# EAGLE board PCEMouse_rev_B (EAGLE 9.6.2)
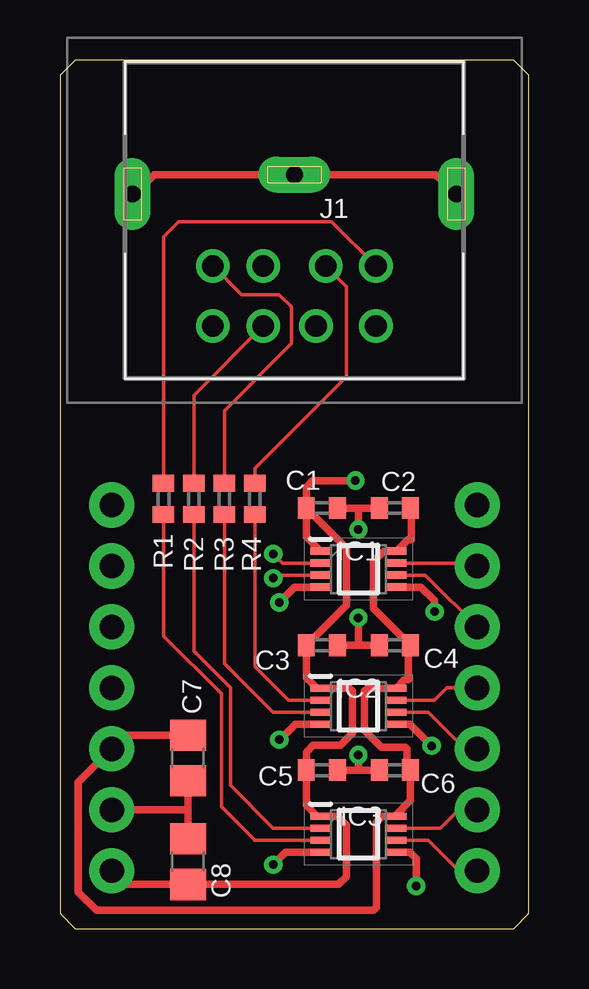
[diagram p0: board, top side]
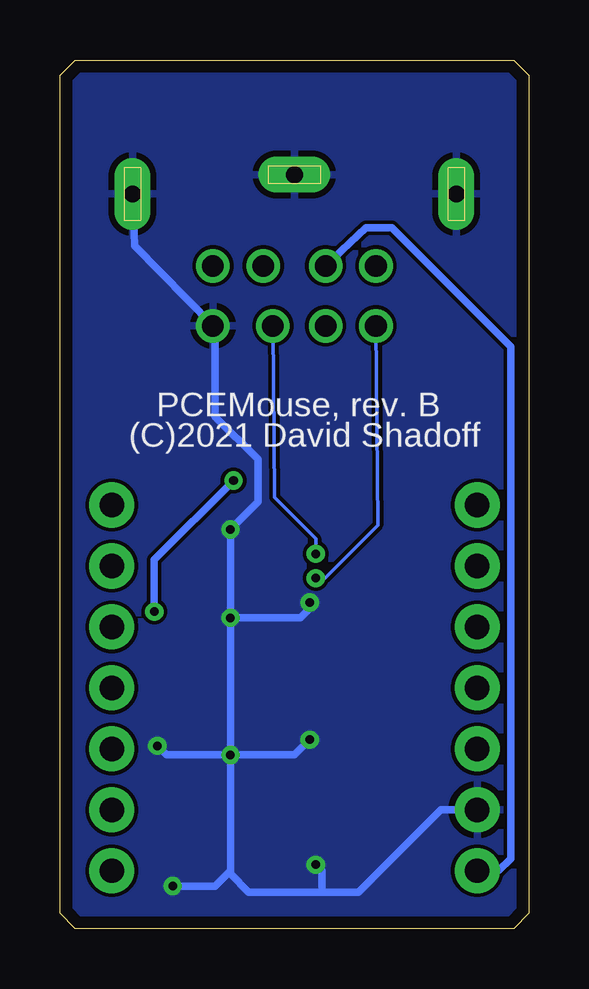
[diagram p1: board, bottom side, seen from below]

Size 19.56 x 36.2 mm. Coordinates in mm from the lower left corner, seen from the top.
Outline: 0,35.56 0,0.64 0.64,0 18.92,0 19.56,0.64 19.56,35.56 18.92,36.2 0.64,36.2 0,35.56
Copper layers (1*16): Top 0.035mm / dielectric 1.5mm / Bottom 0.035mm
Design rules "default *": minimum track width 6mil, minimum drill 0.35mm, track to track 6mil, track to pad 6mil, pad to pad 6mil, via to via 6mil, smd to smd 6mil, copper to edge 20mil, drill to drill 6mil, minimum pad ring 10mil, minimum via ring 8mil, stop-mask expansion 3mil, vias tented up to drill 18mil, thermal gap 10mil
Net classes: 0 default: width 0.152 mm, drill 0.356 mm, clearance 0.152 mm; 1 power: width 0.305 mm, drill 0.356 mm, clearance 0.152 mm; 2 signal: width 0.152 mm, drill 0.356 mm, clearance 0.152 mm

## Footprints (pad centres in the part's own frame; a part is rotated, then mirrored left to right if it is on the bottom)
C0402 = smd 0.7 x 0.9: 1 -0.65,0; 2 0.65,0
C0805 = smd 1.3 x 1.5: 1 -0.95,0; 2 0.95,0
SOP50P310X90-8N = smd 0.85 x 0.3: 1 -1.575,0.75; 2 -1.575,0.25; 3 -1.575,-0.25; 4 -1.575,-0.75; 5 1.575,-0.75; 6 1.575,-0.25; 7 1.575,0.25; 8 1.575,0.75
MD80SGK = drill 0.9 pad 1.4: 1 -1.3,-1.9; 2 1.3,-1.9; 3 -3.4,-1.9; 4 -1.3,-4.4; 5 3.4,-1.9; 6 -3.4,-4.4; 7 0.9,-4.4; 8 3.4,-4.4 | drill 0.7 pad 1.5 long: 9 0,1.9; 10 -6.75,1.1; 11 6.75,1.1
1X07_NO_SILK = drill 1.016 pad 1.88: 1 0,0; 2 2.54,0; 3 5.08,0; 4 7.62,0; 5 10.16,0; 6 12.7,0; 7 15.24,0
R0402 = smd 0.7 x 0.9: 1 -0.65,0; 2 0.65,0

## Placement (x,y rotation side)
C1  0.1uF  [C0402]  10.92,17.53 0 top
C2  0.1uF  [C0402]  13.97,17.53 180 top
C3  0.1uF  [C0402]  10.92,11.81 0 top
C4  0.1uF  [C0402]  13.97,11.81 180 top
C5  0.1uF  [C0402]  10.92,6.6 0 top
C6  0.1uF  [C0402]  13.97,6.6 180 top
C7  10uF  [C0805]  5.33,7.11 270 top
C8  10uF  [C0805]  5.33,2.79 90 top
IC1  SN74LVC2T45DCUR  [SOP50P310X90-8N]  12.45,14.99 0 top
IC2  SN74LVC2T45DCUR  [SOP50P310X90-8N]  12.45,9.27 0 top
IC3  SN74LVC2T45DCUR  [SOP50P310X90-8N]  12.45,3.94 0 top
J1  MD-80SGK  [MD80SGK]  9.78,29.51 0 top
J4  [1X07_NO_SILK]  17.4,17.65 270 top
J5  [1X07_NO_SILK]  2.16,17.65 270 top
R1  330  [R0402]  4.32,17.91 90 top
R2  330  [R0402]  5.59,17.91 90 top
R3  330  [R0402]  6.86,17.91 90 top
R4  330  [R0402]  8.13,17.91 90 top

## Library data of the parts
C1-C8 R1-R4 = resistor
IC1-IC3 = PC-Engine; ARROW_PART_NUMBER: SN74LVC2T45DCUR; ARROW_PRICE-STOCK: https://www.arrow.com/en/products/sn74lvc2t45dcur/texas-instruments?region=nac; DESCRIPTION: Texas Instruments SN74LVC2T45DCUR, Voltage Level Translator, Bus Transceiver, 3-State, 1.65 5.5 V, 8-Pin UM; HEIGHT: 0.9mm; MANUFACTURER_NAME: Texas Instruments; MANUFACTURER_PART_NUMBER: SN74LVC2T45DCUR; MOUSER_PART_NUMBER: 595-SN74LVC2T45DCUR; MOUSER_PRICE-STOCK: https://www.mouser.co.uk/ProductDetail/Texas-Instruments/SN74LVC2T45DCUR?qs=0smPjiIwnfIdG9vxyJHBdA%3D%3D
J1 = SamacSys_Parts; DESCRIPTION: Circular DIN Connectors mini-DIN, 8P jack, rt, through hole, full shield; HEIGHT: 13mm; MANUFACTURER_NAME: CUI; MANUFACTURER_PART_NUMBER: MD-80SGK; MOUSER_PART_NUMBER: 490-MD-80SGK; MOUSER_PRICE-STOCK: https://www.mouser.com/Search/Refine.aspx?Keyword=490-MD-80SGK
J4 J5 = SparkFun-Connectors

## Nets
+3V3 [power]: C2.1 C4.1 C6.1 C7.1 IC1.8 IC2.8 IC3.8 J5.5
+5V [power]: C1.1 C3.1 C5.1 C8.1 IC1.1 IC1.5 IC2.1 IC3.1 J1.1 J5.7
CLR [signal]: IC1.2 J1.7
D0_OUT: J1.2 R4.2
D1_OUT: J1.3 R3.2
D2_OUT: J1.4 R2.2
D3_OUT: J1.5 R1.2
GND: C1.2 C2.2 C3.2 C4.2 C5.2 C6.2 C7.2 C8.2 IC1.4 IC2.4 IC2.5 IC3.4 IC3.5 J1.8 J1.9 J1.10 J1.11 J5.6
N$2: IC1.7 J4.2
N$3: IC3.6 J4.7
N$4: IC3.7 J4.6
N$5: IC2.6 J4.5
N$6: IC2.7 J4.4
N$7: IC1.6 J4.3
N$8: IC3.3 R1.1
N$9: IC3.2 R2.1
N$10: IC2.3 R3.1
N$11: IC2.2 R4.1
SEL [signal]: IC1.3 J1.6

## Tracks (layer width: path | path; a pad name or v marks a point on that pad's centre or on a via)
+3V3
  Top 0.305: C7.1 2.73,8.06 J5.5 0.76,6.1 0.76,1.52 1.52,0.76 13.08,0.76 13.21,0.89 13.21,4.45 13.45,4.69 IC3.8 14.02,4.75 14.62,5.35 C6.1 14.48,6.75 14.48,7.49 14.41,7.56 13.41,7.56 12.7,8.27 12.7,9.91 12.81,10.02 IC2.8 14.37,10.37 14.52,10.37 14.52,11.71 C4.1 13.08,13.35 13.08,15.3 13.52,15.74 IC1.8 14.5,16.21 14.65,16.21 14.65,17.5 C2.1
+5V  (via drill 0.36)
  Top 0.305: J5.7 2.73,1.84 C8.1 11.62,1.84 11.94,2.16 11.94,4.32 11.57,4.69 IC3.1 10.72,4.69 10.27,5.14 C5.1 10.27,7.35 10.56,7.64 11.69,7.64 12.19,8.14 12.19,9.91 12.08,10.02 IC2.1 10.72,10.02 10.29,10.46 10.29,11.8 C3.1 11.94,13.48 11.94,15.86 C1.1 | C1.1 10.27,18.4 10.54,18.67 v12.32,18.67 | v15.62,13.21 15.62,13.68 15.06,14.24 IC1.5 | IC1.1 10.27,16.34 C1.1
  Bottom 0.305: v12.32,18.67 15.62,15.37 v15.62,13.21 | J1.1 6.81,29.21 5.71,29.21 0.76,24.26 0.76,2.92 1.27,2.41 J5.7
CLR  (via drill 0.36)
  Top 0.152: IC1.2 9.28,15.24 v8.89,15.62
  Bottom 0.152: J1.7 10.6,17.97 8.89,16.26 v8.89,15.62
D0_OUT
  Top 0.152: R4.2 8.13,19.18 11.94,22.99 11.94,26.76 J1.2
D1_OUT
  Top 0.152: R3.2 6.86,21.59 9.65,24.38 9.65,25.91 9.14,26.42 7.58,26.42 J1.3
D2_OUT
  Top 0.152: J1.4 5.59,22.22 R2.2
D3_OUT
  Top 0.152: R1.2 4.32,28.83 4.95,29.46 11.33,29.46 J1.5
GND  (via drill 0.36)
  Top 0.305: J1.11 15.65,31.41 J1.9 9.7,31.42 3.94,31.42 3.13,30.61 J1.10 | J5.6 5.33,4.95 | 5.33,4.95 C7.2 | 5.33,4.95 C8.2 | v12.45,16.64 12.45,17.53 | 12.45,17.53 C1.2 | 12.45,17.53 C2.2 | C3.2 12.45,11.81 | 12.45,11.81 C4.2 | 12.45,11.81 v12.45,12.95 | v12.45,7.24 12.45,6.6 | C5.2 12.45,6.6 | 12.45,6.6 C6.2 | v9.14,7.87 9.19,7.87 9.83,8.52 IC2.4 | IC1.4 9.79,14.24 v9.14,13.59 | IC2.5 14.59,8.52 v15.49,7.62 | IC3.4 9.41,3.19 v8.89,2.67 | IC3.5 14.59,3.19 14.86,2.92 v14.86,1.78
  Bottom 0.305: J1.11 16.45,28.46 J1.8 13.08,25.09 13.08,21.34 11.3,19.56 11.3,17.78 v12.45,16.64 v12.45,12.95 | J5.6 3.68,4.95 7.11,1.52 8.64,1.52 | 8.64,1.52 11.68,1.52 12.45,2.29 12.45,2.41 | 12.45,2.41 v12.45,7.24 | v12.45,7.24 v12.45,12.95 | v12.45,7.24 9.78,7.24 v9.14,7.87 | v15.49,7.62 15.11,7.24 v12.45,7.24 | v12.45,12.95 9.53,12.95 9.14,13.34 v9.14,13.59 | 12.45,2.41 13.08,1.78 v14.86,1.78 | 8.64,1.52 8.64,2.41 v8.89,2.67
  pour Bottom: -0.51,-0.51 -0.51,36.58 20.19,36.58 20.19,-0.51
N$2
  Top 0.152: IC1.7 17.28,15.24 J4.2
N$3
  Top 0.152: J4.7 16.64,2.41 15.36,3.69 IC3.6
N$4
  Top 0.152: J4.6 16.64,4.95 15.87,4.19 IC3.7
N$5
  Top 0.152: J4.5 16.89,7.49 15.36,9.02 IC2.6
N$6
  Top 0.152: J4.4 16.13,10.03 15.81,9.72 15.69,9.6 15.62,9.52 IC2.7
N$7
  Top 0.152: J4.3 15.37,14.61 15.31,14.66 15.24,14.74 IC1.6
N$8
  Top 0.152: R1.1 4.32,12.19 6.73,9.78 6.73,5.08 8.06,3.75 8.12,3.69 IC3.3
N$9
  Top 0.152: R2.1 5.59,11.56 7.11,10.03 7.11,5.97 8.89,4.19 IC3.2
N$10
  Top 0.152: R3.1 6.86,11.05 8.89,9.02 IC2.3
N$11
  Top 0.152: R4.1 8.13,10.92 9.53,9.52 IC2.2
SEL  (via drill 0.36)
  Top 0.152: IC1.3 9.02,14.74 v8.89,14.61
  Bottom 0.152: J1.6 6.3,16.81 8.51,14.61 v8.89,14.61

## Text on the board
bNames: PCEMouse, rev. B | (C)2021 David Shadoff
tValues: JLCJLCJLCJLC